# Altium PCB _Geeky_ PCB copy_2023-02-18.pcbdoc
Units mil, origin at the board's own origin, x right, y up, seen from the top; angles counter-clockwise.
Board outline 4000 x 5900 mil, 2 copper layers (Top Layer, Bottom Layer); 83 components, 132 nets, 427 pads, 638 vias.
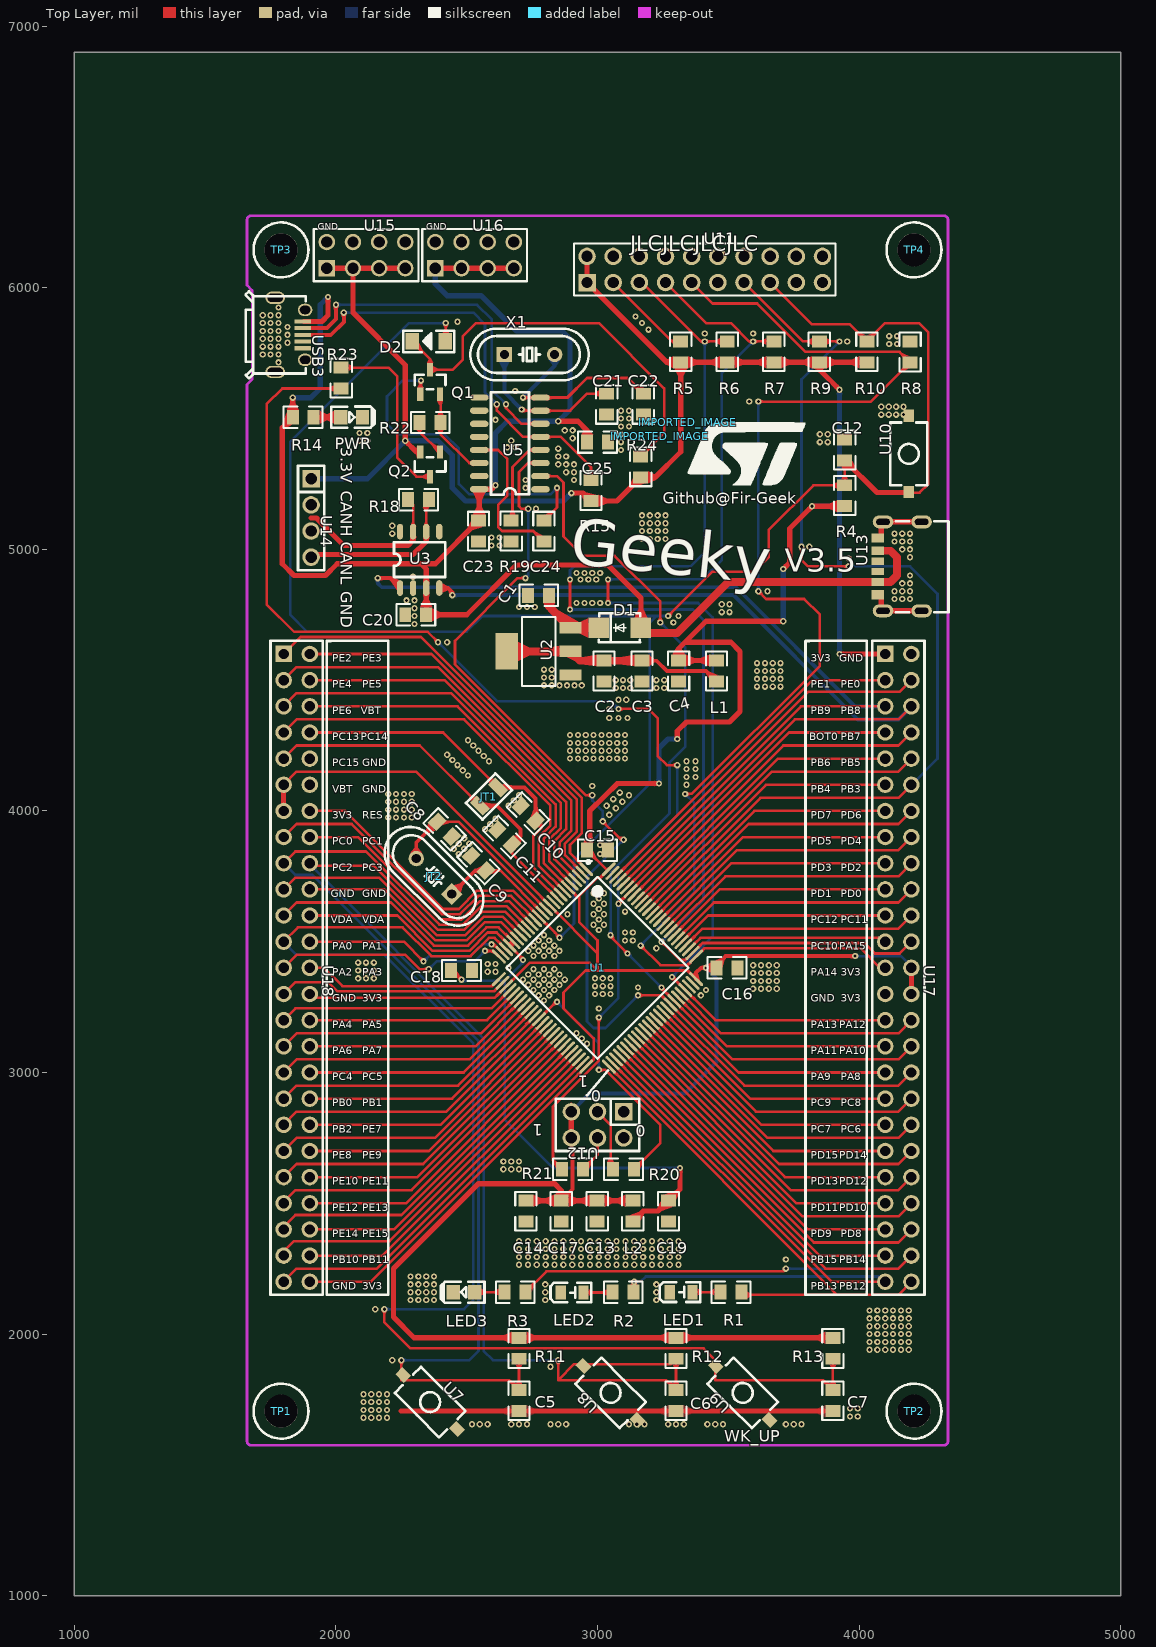
[diagram p0: Top Layer view]
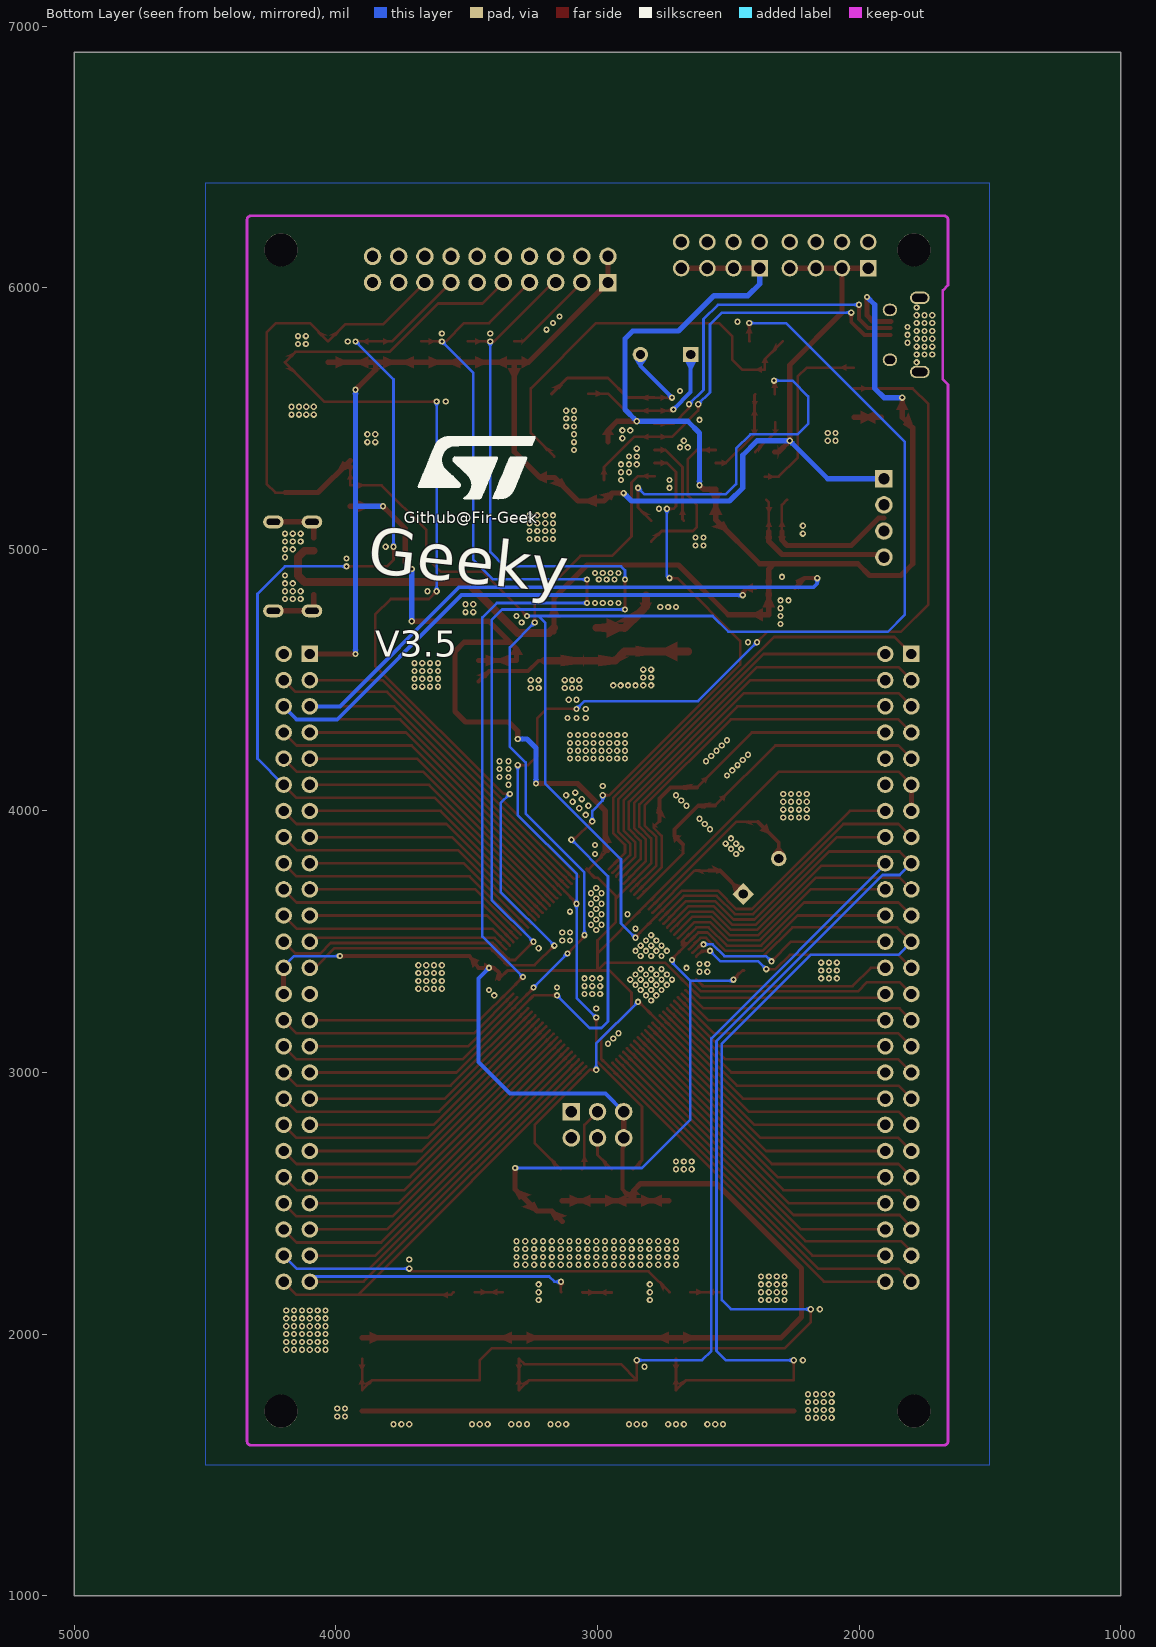
[diagram p1: Bottom Layer view, seen from below]

## Layer stack, top to bottom
Top Layer: signal copper (thickness not stored)
Dielectric: dielectric 12.6, FR-4, Dk 4.8
Bottom Layer: signal copper (thickness not stored)

## Board outline
5000,1000 1000,1000 1000,6900 5000,6900

## Components (designator, comment, footprint, x,y, rotation, side; value= is the part's Value field where it differs from the comment)
C1 "22u" 0805 2775,4824.11 r180 top
C2 "22u" 0805 3025,4535 r270 top
C3 "100n" 0805 3170,4535 r270 top
C4 "22u" 0805 3310,4535 r270 top
C5 "100n" 0805 2700,1745.51 r90 top
C6 "100n" 0805 3300,1745.51 r90 top
C7 "100n" 0805 3900,1745.51 r90 top
C8 "20P" 0805 2415,3930 r135 top
C9 "20P" 0805 2545,3800 r315 top
C10 "10P" 0805 2735,3990 r315 top
C11 "10P" 0805 2645,3900 r315 top
C12 "100n" 0805 3945,5380 r90 top
C13 "22u" 0805 2998.75,2470 r90 top
C14 "100n" 0805 2726.25,2470 r90 top
C15 "100n" 0805 3000,3850 r180 top
C16 "100n" 0805 3495,3400 r180 top
C17 "100n" 0805 2861.25,2470 r90 top
C18 "100n" 0805 2480,3390 r180 top
C19 "22u" 0805 3271.25,2470 r90 top
C20 "100n" 0805 2305,4750 r180 top
C21 "22P" 0805 3035,5555 r90 top
C22 "22P" 0805 3175,5555 r90 top
C23 "100n" 0805 2545,5070 r90 top
C24 "100n" 0805 2670,5070 r270 top
C25 "10u" 0805 3000,5410 r180 top
D1 "SS210" SMA_L4.3-W2.6-LS5.2-FD 3085,4700 r180 top
D2 "IN4148" D1206 2355,5795 r180 top
IMPORTED_IMAGE "IMPORTED_IMAGE" IMPORTED_IMAGE 3237.6,5432.51 r0 top
IMPORTED_IMAGE "IMPORTED_IMAGE" IMPORTED_IMAGE 3345.6,5485.36 r0 top
JT1 "32.768KHz" OSC-SMD_L3.2-W1.5 2585,4055 r45 top
JT2 "8MHz" HC-49US_L11.5-W4.5-P4.88 2375,3750 r135 top
L1 "10u" 0805 3455,4535 r90 top
L2 "10u" 0805 3135,2470 r90 top
LED1 "17-21SUYC/TR8" LED0805-RD 3320,2160 r0 top
LED2 "17-21/BHC-XL2M2TY/3T" LED0805-RD 2902.98,2158.81 r0 top
LED3 "D-W080508W1-KS2" LED-0805 2489.38,2160 r0 top
PWR "17-21SURC/S530-A2/TR8" LED-0805 2060,5505 r180 top
Q1 "SS8050" SOT-23_L2.9-W1.3-P0.95-LS2.4-BR 2360,5640 r270 top
Q2 "SS8550" SOT-23_L2.9-W1.3-P0.95-LS2.4-BR 2360,5325 r90 top
R1 "330" 0805 3510,2160 r180 top
R2 "330" 0805 3097.98,2160.03 r180 top
R3 "330" 0805 2685,2160 r180 top
R4 "10k" 0805 3945,5205 r270 top
R5 "10k" 0805 3318.02,5755 r270 top
R6 "10k" 0805 3496.01,5755 r270 top
R7 "10k" 0805 3674.01,5755 r270 top
R8 "10k" 0805 4195,5755 r90 top
R9 "10k" 0805 3848.02,5755 r270 top
R10 "10k" 0805 4030,5755 r270 top
R11 "10k" 0805 2700,1945.51 r90 top
R12 "10k" 0805 3300,1945.51 r90 top
R13 "10k" 0805 3900,1945.51 r90 top
R14 "1k" 0805 1875,5505 r0 top
R15 "1.5k" 0805 2975,5225 r270 top
R18 "120" 0805 2315,5190 r180 top
R19 "1k" 0805 2795,5070 r90 top
R20 "10k" 0805 3100,2630 r0 top
R21 "10k" 0805 2905,2630 r0 top
R22 "1k" 0805 2360,5485 r180 top
R23 "1k" 0805 2020,5655 r270 top
R24 "10K" 0805 3165,5315 r270 top
TP1 "M3铜柱" M3铜柱_LCEDA 1790,1705 r0 top
TP2 "M3铜柱" M3铜柱_LCEDA 4210,1705 r0 top
TP3 "M3铜柱" M3铜柱_LCEDA 1790,6145 r0 top
TP4 "M3铜柱" M3铜柱_LCEDA 4210,6145 r0 top
U1 "STM32F103VET6" LQFP-100_L14.0-W14.0-P0.50-LS16.0-BL 3000,3400 r225 top
U2 "AMS1117-3.3" SOT-223_L6.5-W3.5-P2.30-LS7.0-BR 2775,4610 r0 top
U3 "TJA1050T" SOIC-8_L5.0-W4.0-P1.27-LS6.0-BL 2320,4960 r0 top
U5 "CH340G" SOIC-16_L9.9-W3.9-P1.27-LS6.0-BL 2665,5405 r90 top
U7 "KEY-SMD_2P-L6.0-W3.6-P7.4-LS8.0-L" KEY-SMD_2P-L6.0-W3.6-P7.4-LS8.0-L 2360,1740 r315 top
U8 "KEY-SMD_2P-L6.0-W3.6-P7.4-LS8.0-L" KEY-SMD_2P-L6.0-W3.6-P7.4-LS8.0-L 3050,1775 r135 top
U9 "KEY-SMD_2P-L6.0-W3.6-P7.4-LS8.0-L" KEY-SMD_2P-L6.0-W3.6-P7.4-LS8.0-L 3555,1775 r135 top
U10 "KEY-SMD_2P-L6.0-W3.6-P7.4-LS8.0-L" KEY-SMD_2P-L6.0-W3.6-P7.4-LS8.0-L 4190,5365 r90 top
U11 "HDR-TH_20P-P2.54-V-M-R2-C10-S2.54-3" HDR-TH_20P-P2.54-V-M-R2-C10-S2.54-3 3410,6070 r0 top
U12 "HDR-TH_6P-P2.54-V-F-R2-C3-S2.54-3" HDR-TH_6P-P2.54-V-F-R2-C3-S2.54-3 3000,2800 r180 top
U13 "USB-SMD_U262-061N-4BVC11" USB-SMD_U262-061N-4BVC11 4155,4935 r90 top
U14 "HDR-TH_4P-P2.54-V-M" HDR-TH_4P-P2.54-V-M 1905,5120 r270 top
U15 "HDR-TH_8P-P2.54-V-F-R2-C4-S2.54-3" HDR-TH_8P-P2.54-V-F-R2-C4-S2.54-3 2115,6125 r0 top
U16 "HDR-TH_8P-P2.54-V-F-R2-C4-S2.54-3" HDR-TH_8P-P2.54-V-F-R2-C4-S2.54-3 2530,6125 r0 top
U17 "HDR-TH_50P-P2.54-V-F-R2-C25-S2.54-3" HDR-TH_50P-P2.54-V-F-R2-C25-S2.54-3 4150,3400 r270 top
U18 "HDR-TH_50P-P2.54-V-F-R2-C25-S2.54-3" HDR-TH_50P-P2.54-V-F-R2-C25-S2.54-3 1850,3400 r270 top
USB3 "MICRO-USB-SMD_U254-051T-4BHJ25-F2S" MICRO-USB-SMD_U254-051T-4BHJ25-F2S 1825,5820 r270 top
X1 "12MHz" HC-49US_L11.5-W4.5-P4.88 2740,5745 r0 top

## Footprints (in the part's own frame and the unit in brackets; to place one, negate y for a bottom-side part, rotate by r counter-clockwise, add the part's x,y. Pads: shape width x height; smd on the part's side, far side on the other; paste and mask are expansions set on the pad)
0805 [mm]
  rect 1.16x1.45 smd: 1(-1.016,0) 2(1.016,0)
  silkscreen extent -1.9,-1.03 1.87,1.04
D1206 [mm]
  rect 1.3x1.6 smd: 1(-1.6,0) 2(1.6,0)
  silkscreen extent -2.49,-1.04 2.49,1.04
HC-49US_L11.5-W4.5-P4.88 [mm]
  rect 1.5x1.5 hole 0.9: 1(-2.438,0)
  round 1.5 hole 0.9: 2(2.438,0)
  silkscreen extent -5.74,-2.5 5.74,2.5
HDR-TH_4P-P2.54-V-M [mm]
  rect 1.7x1.7 hole 1.1: 1(-3.81,0)
  round 1.7 hole 1.1: 2(-1.27,0) 3(1.27,0) 4(3.81,0)
  silkscreen extent -5.08,-1.27 5.08,1.27
HDR-TH_6P-P2.54-V-F-R2-C3-S2.54-3 [mm]
  rect 1.7x1.7 hole 1.1: 1(-2.54,-1.27)
  round 1.7 hole 1.1: 2(-2.54,1.27) 3(0,-1.27) 4(0,1.27) 5(2.54,-1.27) 6(2.54,1.27)
  silkscreen extent -4.04,-2.54 4.04,2.54
HDR-TH_8P-P2.54-V-F-R2-C4-S2.54-3 [mm]
  rect 1.6x1.6 hole 1.1: 1(-3.81,-1.27)
  round 1.6 hole 1.1: 2(-3.81,1.27) 3(-1.27,-1.27) 4(-1.27,1.27) 5(1.27,-1.27) 6(1.27,1.27) 7(3.81,-1.27) 8(3.81,1.27)
  silkscreen extent -5.08,-2.54 5.08,2.54
HDR-TH_20P-P2.54-V-M-R2-C10-S2.54-3 [mm]
  rect 1.7x1.7 hole 1.1: 1(-11.43,-1.27)
  round 1.7 hole 1.1: 2(-11.43,1.27) 3(-8.89,-1.27) 4(-8.89,1.27) 5(-6.35,-1.27) 6(-6.35,1.27) 7(-3.81,-1.27) 8(-3.81,1.27) 9(-1.27,-1.27) 10(-1.27,1.27) 11(1.27,-1.27) 12(1.27,1.27) 13(3.81,-1.27) 14(3.81,1.27) 15(6.35,-1.27) 16(6.35,1.27) 17(8.89,-1.27) 18(8.89,1.27) 19(11.43,-1.27) 20(11.43,1.27)
  silkscreen extent -12.7,-2.54 12.7,2.54
HDR-TH_50P-P2.54-V-F-R2-C25-S2.54-3 [mm]
  rect 1.6x1.6 hole 1: 1(-30.48,-1.27)
  round 1.6 hole 1: 2(-30.48,1.27) 3(-27.94,-1.27) 4(-27.94,1.27) 5(-25.4,-1.27) 6(-25.4,1.27) 7(-22.86,-1.27) 8(-22.86,1.27) 9(-20.32,-1.27) 10(-20.32,1.27) 11(-17.78,-1.27) 12(-17.78,1.27) 13(-15.24,-1.27) 14(-15.24,1.27) 15(-12.7,-1.27) 16(-12.7,1.27) 17(-10.16,-1.27) 18(-10.16,1.27) 19(-7.62,-1.27) 20(-7.62,1.27) 21(-5.08,-1.27) 22(-5.08,1.27) 23(-2.54,-1.27) 24(-2.54,1.27) 25(0,-1.27) 26(0,1.27) 27(2.54,-1.27) 28(2.54,1.27) 29(5.08,-1.27) 30(5.08,1.27) 31(7.62,-1.27) 32(7.62,1.27) 33(10.16,-1.27) 34(10.16,1.27) 35(12.7,-1.27) 36(12.7,1.27) 37(15.24,-1.27) 38(15.24,1.27) 39(17.78,-1.27) 40(17.78,1.27) 41(20.32,-1.27) 42(20.32,1.27) 43(22.86,-1.27) 44(22.86,1.27) 45(25.4,-1.27) 46(25.4,1.27) 47(27.94,-1.27) 48(27.94,1.27) 49(30.48,-1.27) 50(30.48,1.27)
  silkscreen extent -31.75,-2.54 31.75,2.54
IMPORTED_IMAGE [mil]
KEY-SMD_2P-L6.0-W3.6-P7.4-LS8.0-L [mm]
  rect 1.2x1 smd: 1(-3.7,0) 2(3.7,0)
  silkscreen extent -3.05,-1.8 3.05,1.8
LED0805-RD [mm]
  rect 1x1.4 smd: 1(-1.1,0) 2(1.1,0)
  silkscreen extent -2.1,-0.95 1.85,0.95
LED-0805 [mil]
  rect 51.2x55.1 smd: 1(41.35,0) 2(-41.35,0)
  silkscreen extent -88,-41 78,40
LQFP-100_L14.0-W14.0-P0.50-LS16.0-BL [mm]
  oval 0.28x1.8 smd: 1(-6,-7.55) 2(-5.5,-7.55) 3(-5,-7.55) 4(-4.5,-7.55) 5(-4,-7.55) 6(-3.5,-7.55) 7(-3,-7.55) 8(-2.5,-7.55) 9(-2,-7.55) 10(-1.5,-7.55) 11(-1,-7.55) 12(-0.5,-7.55) 13(0,-7.55) 14(0.5,-7.55) 15(1,-7.55) 16(1.5,-7.55) 17(2,-7.55) 18(2.5,-7.55) 19(3,-7.55) 20(3.5,-7.55) 21(4,-7.55) 22(4.5,-7.55) 23(5,-7.55) 24(5.5,-7.55) 25(6,-7.55) 51(6,7.55) 52(5.5,7.55) 53(5,7.55) 54(4.5,7.55) 55(4,7.55) 56(3.5,7.55) 57(3,7.55) 58(2.5,7.55) 59(2,7.55) 60(1.5,7.55) 61(1,7.55) 62(0.5,7.55) 63(0,7.55) 64(-0.5,7.55) 65(-1,7.55) 66(-1.5,7.55) 67(-2,7.55) 68(-2.5,7.55) 69(-3,7.55) 70(-3.5,7.55) 71(-4,7.55) 72(-4.5,7.55) 73(-5,7.55) 74(-5.5,7.55) 75(-6,7.55)
  oval 1.8x0.28 smd: 26(7.55,-6) 27(7.55,-5.5) 28(7.55,-5) 29(7.55,-4.5) 30(7.55,-4) 31(7.55,-3.5) 32(7.55,-3) 33(7.55,-2.5) 34(7.55,-2) 35(7.55,-1.5) 36(7.55,-1) 37(7.55,-0.5) 38(7.55,0) 39(7.55,0.5) 40(7.55,1) 41(7.55,1.5) 42(7.55,2) 43(7.55,2.5) 44(7.55,3) 45(7.55,3.5) 46(7.55,4) 47(7.55,4.5) 48(7.55,5) 49(7.55,5.5) 50(7.55,6) 76(-7.55,6) 77(-7.55,5.5) 78(-7.55,5) 79(-7.55,4.5) 80(-7.55,4) 81(-7.55,3.5) 82(-7.55,3) 83(-7.55,2.5) 84(-7.55,2) 85(-7.55,1.5) 86(-7.55,1) 87(-7.55,0.5) 88(-7.55,0) 89(-7.55,-0.5) 90(-7.55,-1) 91(-7.55,-1.5) 92(-7.55,-2) 93(-7.55,-2.5) 94(-7.55,-3) 95(-7.55,-3.5) 96(-7.55,-4) 97(-7.55,-4.5) 98(-7.55,-5) 99(-7.55,-5.5) 100(-7.55,-6)
  silkscreen extent -6.8,-8.05 6.25,6.25
M3铜柱_LCEDA [mm]
  round 3.2 hole 3.2: 1(0,0)
  silkscreen extent -2.66,-2.67 2.67,2.67
MICRO-USB-SMD_U254-051T-4BHJ25-F2S [mm]
  rect 0.4x1.6 smd: 1(-1.3,1.2) 2(-0.65,1.2) 3(0,1.2) 4(0.65,1.2) 5(1.3,1.208)
  oval 1.2x1.4 hole 0.8 slot 1 at 90 deg: 6(2.425,1.45) 7(-2.425,1.45)
  oval 1.2x1.9 hole 0.8 slot 1.5 at 90 deg: 8(-3.6,-1.45) 9(3.6,-1.45)
  silkscreen extent -4.23,-4.32 4.23,1.53
OSC-SMD_L3.2-W1.5 [mm]
  rect 1x1.8 smd: 1(-1.25,0) 2(1.25,0)
  silkscreen extent -2.03,-1.14 2.03,1.14
SMA_L4.3-W2.6-LS5.2-FD [mm]
  rect 2x2 smd: 1(-2.057,0) 2(2.057,0)
  silkscreen extent -2.01,-1.4 2.03,1.4
SOIC-8_L5.0-W4.0-P1.27-LS6.0-BL [mm]
  oval 0.6x1.52 smd: 1(-1.905,-2.74) 2(-0.635,-2.74) 3(0.635,-2.74) 4(1.905,-2.74) 5(1.905,2.74) 6(0.635,2.74) 7(-0.635,2.74) 8(-1.905,2.74)
  silkscreen extent -2.49,-1.67 2.5,1.7
SOIC-16_L9.9-W3.9-P1.27-LS6.0-BL [mm]
  oval 0.6x1.8 smd: 1(-4.445,-2.972) 2(-3.175,-2.972) 3(-1.905,-2.972) 4(-0.635,-2.972) 5(0.635,-2.972) 6(1.905,-2.972) 7(3.175,-2.972) 8(4.445,-2.972) 9(4.445,2.972) 10(3.175,2.972) 11(1.905,2.972) 12(0.635,2.972) 13(-0.635,2.972) 14(-1.905,2.972) 15(-3.175,2.972) 16(-4.445,2.972)
  silkscreen extent -4.98,-1.85 4.98,1.83
SOT-23_L2.9-W1.3-P0.95-LS2.4-BR [mm]
  rect 1.3x0.6 smd: 1(1.2,-0.95) 2(1.2,0.95) 3(-1.2,0)
  silkscreen extent -0.7,-1.5 0.7,1.5
SOT-223_L6.5-W3.5-P2.30-LS7.0-BR [mil]
  rect 85x43 smd: 1(122,-90.5) 2(122,0.5) 3(122,90.5)
  rect 85x138 smd: 4(-122,0.5)
  silkscreen extent -64,-132 64,132
USB-SMD_U262-061N-4BVC11 [mm]
  oval 1.25x2 hole 0.6 slot 1.3 at 90 deg: 7(-4.32,1.611) 8(4.32,1.611) 9(-4.32,-2.139) 10(4.32,-2.139)
  rect 0.7x1.2 smd: A5(-0.5,2.139) B5(0.5,2.139)
  rect 0.8x1.2 smd: A9(1.52,2.139) B9(-1.52,2.139)
  rect 0.9x1.2 smd: A12(2.75,2.139) B12(-2.75,2.139)
  silkscreen extent -4.47,-4.75 4.4,0.39

## Via types
v1: diameter 24, hole 12, Top Layer to Bottom Layer, tented both sides, 638 vias

## Nets (pads, with @x,y where several pads share a name; then routed paths per layer and width w, separated by ;. In a path a pad name is that pad's centre, name@x,y a point inside that pad or via, vN(x,y) a via of type N, cw(c..) or ccw(c..) an arc to the next point about the centre after c; other vN are vias at no path point)
+5V: C20.1 C23.2 C25.2 D1.1 R14.1 U3.3 U5.16 | length 6775.9
  Top Layer w20: v1(1835,5580) 1835,5560 R14.1 1795,5465 1795,4945 1840,4900 1960,4900 2005,4945 2325,4945 ; 1879,5871.2 1946.2,5871.2 1970,5895 v1(1970,5965) ; U3.3 2345,4925 2325,4945 ; U3.3 C20.1 2500,4750 2690,4940 3040,4940 3166,4814 D1.1 D1.1@3166,4685 ; 2380,6075 2480.01,6075 2580.01,6075 2680.01,6075 ; v1(2610,5245) 2595,5230 U5.16 2548,5113 C23.2 2380,4945 2325,4945 ; v1(2850,5490) 2925,5490 2960,5455 C25.2
  Top Layer w30: D1.1 3186,4680 3305,4680 3500.2,4875.2 4085.2,4875.2 4120.2,4875.2 4145,4900 4145,4970 4120.2,4994.8 4085.2,4994.8
  Bottom Layer w20: v1(1835,5580) 1905,5580 1940,5615 1940,5935 v1(1970,5965) ; 2380,6075 2380,6015 2425,5970 2555,5970 2690,5835 2865,5835 2895,5805 2895,5535 v1(2850,5490) 2655,5490 2610,5445 v1(2610,5245)
BOOT0: R21.1 R23.2 U1.94 | length 6033.3
  Top Layer w10: R23.2 1795,5615 1735,5555 1735,4790 1840,4685 2350,4685 v1(2390,4645) ; R21.1 2830,2665 2830,2870 3005,3045 v1(3005,3210) ; v1(3080,3645) 3080,3647 U1.94 3733,4300 4100,4300 ; v1(3080,4390) 3195,4390 3230,4355 3230,4210 3265,4175 v1(3305,4175)
  Bottom Layer w10: v1(2390,4645) 2615,4420 3050,4420 v1(3080,4390) ; v1(3005,3210) 3080,3285 v1(3080,3645) 3080,3760 3305,3985 v1(3305,4175)
GND: C1.2 C2.2 C3.2 C4.2 C5.1 C6.1 C7.1 C8.1 C9.1 C10.1 C11.1 C12.2 C13.1 C14.1 C15.1 C16.1 C17.1 C18.1 C19.1 C20.2 C21.1 C22.1 C23.1 C24.2 C25.1 LED1.1 LED2.1 LED3.2 PWR.2 R8.2 U1.10 U1.19 U1.20 U1.27 U1.49 U1.74 U1.99 U2.1 U3.2 U3.8 U5.1 | length 6447.1
  Top Layer w10: 1800,2200 1850,2250 2156.2,2250 U1.49 ; 1800,3300 1845,3345 1970,3345 2005,3310 2603.8,3310 U1.27 ; 1800,3700 1845,3745 2165,3745 2385,3525 2495,3525 2565,3595 2638,3595 U1.19 ; 1900,3700 2185,3700 2380,3505 2500,3505 2570,3575 2630.1,3575 U1.20
  Top Layer w20: 2250,1705.9 2550,1705.9 C5.1 2850,1705.9 3150,1705.9 C6.1 3450,1705.9 3750,1705.9 C7.1 ; 4085.2,4826.7 4085.2,4764.9 4234.8,4764.9 ; 4085.2,5043.3 4085.2,5105.1 4234.8,5105.1
  other v1: 2520,1655 2550,1655 2580,1655 2670,1655 2700,1655 2730,1655 2820,1655 2850,1655 2880,1655 3120,1655 3150,1655 3180,1655 3270,1655 3300,1655 3330,1655 3420,1655 3450,1655 3480,1655 3720,1655 3750,1655 3780,1655 2105,1680 2135,1680 2165,1680 2195,1680 3965,1685 3995,1685 2105,1710 2135,1710 2165,1710 2195,1710 3965,1715 3995,1715 2105,1740 2135,1740 2165,1740 2195,1740 2105,1770 2135,1770 2165,1770 2195,1770 2820,1875 2215,1900 4040,1940 4070,1940 4100,1940 4130,1940 4160,1940 4190,1940 4040,1970 4070,1970 4100,1970 4130,1970 4160,1970 4190,1970 4040,2000 4070,2000 4100,2000 4130,2000 4160,2000 4190,2000 4040,2030 4070,2030 4100,2030 4130,2030 4160,2030 4190,2030 4040,2060 4070,2060 4100,2060 4130,2060 4160,2060 4190,2060 4040,2090 4070,2090 4100,2090 4130,2090 4160,2090 4190,2090 2150,2095 2285,2130 2315,2130 2345,2130 2375,2130 2800,2130 3225,2130 2285,2160 2315,2160 2345,2160 2375,2160 2800,2160 3225,2160 2285,2190 2315,2190 2345,2190 2375,2190 2800,2190 3225,2190 2285,2220 2315,2220 2345,2220 2375,2220 2700,2265 2733.89,2265 2767.78,2265 2801.67,2265 2835.56,2265 2869.45,2265 2903.34,2265 2937.23,2265 2971.11,2265 3005,2265 3038.89,2265 3072.78,2265 3106.67,2265 3140.56,2265 3174.45,2265 3208.34,2265 3242.23,2265 3276.11,2265 3310,2265 3720,2285 2700,2295 2733.89,2295 2767.78,2295 2801.67,2295 2835.56,2295 2869.45,2295 2903.34,2295 2937.23,2295 2971.11,2295 3005,2295 3038.89,2295 3072.78,2295 3106.67,2295 3140.56,2295 3174.45,2295 3208.34,2295 3242.23,2295 3276.11,2295 3310,2295 2700,2325 2733.89,2325 2767.78,2325 2801.67,2325 2835.56,2325 2869.45,2325 2903.34,2325 2937.23,2325 2971.11,2325 3005,2325 3038.89,2325 3072.78,2325 3106.67,2325 3140.56,2325 3174.45,2325 3208.34,2325 3242.23,2325 3276.11,2325 3310,2325 2700,2355 2733.89,2355 2767.78,2355 2801.67,2355 2835.56,2355 2869.45,2355 2903.34,2355 2937.23,2355 2971.11,2355 3005,2355 3038.89,2355 3072.78,2355 3106.67,2355 3140.56,2355 3174.45,2355 3208.34,2355 3242.23,2355 3276.11,2355 3310,2355 2640,2630 2670,2630 2700,2630 2640,2660 2670,2660 2700,2660 2960,3110 2940,3130 2920,3150 3005,3245 2795,3275 2775,3295 2815,3295 3395,3295 2990,3300 3020,3300 3050,3300 2755,3315 2795,3315 2835,3315 3415,3315 3595,3320 3625,3320 3655,3320 3685,3320 3155,3325 2990,3330 3020,3330 3050,3330 2735,3335 2775,3335 2815,3335 2855,3335 3595,3350 3625,3350 3655,3350 3685,3350 2715,3355 2755,3355 2795,3355 2835,3355 2875,3355 2085,3360 2115,3360 2145,3360 2990,3360 3020,3360 3050,3360 2735,3375 2775,3375 2815,3375 2855,3375 3595,3380 3625,3380 3655,3380 3685,3380 2580,3385 2610,3385 2085,3390 2115,3390 2145,3390 2755,3395 2795,3395 2835,3395 2660,3400 3595,3410 3625,3410 3655,3410 3685,3410 2580,3415 2610,3415 2085,3420 2115,3420 2145,3420 2755,3445 2795,3445 2835,3445 2735,3465 2775,3465 2815,3465 2855,3465 3225,3475 2755,3485 2795,3485 2835,3485 2775,3505 2815,3505 3105,3505 3135,3505 2795,3525 3105,3535 3135,3535 3005,3545 2855,3550 2985,3565 3025,3565 3005,3585 2885,3605 2985,3605 3025,3605 3105,3615 3005,3625 2985,3645 3025,3645 3005,3665 2985,3685 3025,3685 3005,3705 2470,3835 3010,3835 2450,3855 2490,3855 3010,3870 2470,3875 2510,3875 2490,3895 2570,3930 2590,3950 2610,3970 2200,3975 2230,3975 2260,3975 2290,3975 3045,3985 2200,4005 2230,4005 2260,4005 2290,4005 3070,4010 2660,4020 3035,4020 2200,4035 2230,4035 2260,4035 2290,4035 3095,4035 2680,4040 3060,4045 2700,4060 3120,4060 2200,4065 2230,4065 2260,4065 2290,4065 3085,4070 2980,4095 3340,4100 3340,4130 3375,4130 2505,4135 2485,4155 3340,4160 3375,4160 2465,4175 2585,4190 3340,4190 3375,4190 2445,4195 2895,4200 2925,4200 2955,4200 2985,4200 3015,4200 3045,4200 3075,4200 3105,4200 2565,4210 2425,4215 2545,4230 2895,4230 2925,4230 2955,4230 2985,4230 3015,4230 3045,4230 3075,4230 3105,4230 2525,4250 2895,4260 2925,4260 2955,4260 2985,4260 3015,4260 3045,4260 3075,4260 3105,4260 2505,4270 2895,4290 2925,4290 2955,4290 2985,4290 3015,4290 3045,4290 3075,4290 3105,4290 3045,4355 3080,4355 3115,4355 3045,4390 3080,4425 3110,4425 3070,4470 3097.5,4470 3125,4470 3225,4470 3255,4470 3610,4475 3640,4475 3670,4475 3700,4475 2795,4480 2825,4480 2855,4480 2883.33,4480 2911.67,4480 2940,4480 3070,4500 3097.5,4500 3125,4500 3225,4500 3255,4500 3610,4505 3640,4505 3670,4505 3700,4505 2795,4510 2825,4510 3610,4535 3640,4535 3670,4535 3700,4535 2795,4540 2825,4540 3610,4565 3640,4565 3670,4565 3700,4565 2425,4645 2300,4715 3290,4720 2300,4745 3310,4745 3475,4760 3505,4760 2300,4775 2700,4780 2730,4780 2760,4780 3475,4790 3505,4790 2920,4795 2950,4795 2980,4795 3010,4795 2270,4805 2300,4805 4135,4810 4165,4810 4195,4810 3650,4840 4135,4840 4165,4840 4195,4840 4165,4870 4195,4870 2935,4885 2965,4885 2995,4885 2295,4895 4195,4900 2920,4910 2950,4910 2980,4910 3010,4910 3960,4965 4195,4970 4165,5000 4195,5000 3810,5010 2595,5015 2625,5015 4135,5030 4165,5030 4195,5030 3170,5040 3200,5040 3230,5040 3260,5040 2595,5045 2625,5045 2215,5060 4135,5060 4165,5060 4195,5060 3170,5070 3200,5070 3230,5070 3260,5070 2215,5090 3170,5100 3200,5100 3230,5100 3260,5100 3170,5130 3200,5130 3230,5130 3260,5130 2765,5155 2725,5235 2725,5265 2910,5265 2880,5295 2910,5295 2850,5325 2880,5325 2910,5325 2850,5355 2880,5355 3090,5380 2850,5385 2655,5390 2685,5390 3090,5410 3850,5410 3880,5410 2090,5415 2120,5415 2670,5415 2905,5425 3090,5440 3850,5440 3880,5440 2090,5445 2120,5445 2875,5455 2905,5455 3090,5470 3120,5470 2610,5495 3090,5500 3120,5500 4085,5515 4113.33,5515 4141.67,5515 4170,5515 3090,5530 3120,5530 4085,5545 4113.33,5545 4141.67,5545 4170,5545 3580,5565 2685,5605 1780,5715 1720,5745 1750,5745 1780,5745 1720,5775 1750,5775 1780,5775 4115,5785 4145,5785 1815,5790 3955,5795 1720,5805 1750,5805 1780,5805 4115,5815 4145,5815 1815,5820 3410,5825 3595,5825 1720,5835 1750,5835 1780,5835 3195,5840 1815,5850 1720,5865 1750,5865 1780,5865 3170,5865 2465,5870 3145,5890 1720,5895 1750,5895 1780,5895 1780,5925
JTRST: R5.1 | length 351.2
  Top Layer w10: 3060,6020 3285,5795 R5.1
NULL: 
OSC-IN: C8.2 JT2.2 U1.12 | length 728.8
  Top Layer w10: C8.2 2469.6,3958.3 U1.12
  Top Layer w15: JT2.2 2307.1,3878.7 C8.2
OSC-OUT: C9.2 JT2.1 U1.13 | length 450.9
  Top Layer w10: C9.2 2628.3,3771.7 U1.13
  Top Layer w15: JT2.1 2532.5,3771.7 C9.2
P3_3: R20.1 | length 244.9
  Top Layer w10: 3000,2850 3050,2800 3050,2640 R20.1
P3_4: R21.2 | length 142.8
  Top Layer w10: R21.2 3000,2685 3000,2750
PA0: C7.2 R13.1 U1.23 | length 5224.2
  Top Layer w10: 1800,3500 1855,3555 2255,3555 2365,3445 2515,3445 2585,3515 2606.6,3515 U1.23 ; v1(2185,2095) 2185,2045 2285,1945 3405,1945 3450,1900 3449.99,1824.05 ; 3450,1824 3750,1824 3861.5,1824 C7.2 R13.1
  Bottom Layer w10: 1800,3500 1850,3450 2185,3450 2525,3110 2525,2130 2490,2095 v1(2185,2095)
PA1: U1.24 | length 808.3
  Top Layer w10: 1900,3500 2260,3500 v1(2335,3425) ; v1(2595,3490) 2603.8,3490 U1.24
  Bottom Layer w10: v1(2335,3425) 2355,3445 2515,3445 2560,3490 v1(2595,3490)
PA2: U1.25 | length 904.4
  Top Layer w10: 1800,3400 1850,3450 2265,3450 2320,3395 v1(2355,3395) ; v1(2570,3465) 2600.9,3465 U1.25
  Bottom Layer w10: v1(2355,3395) 2385,3425 2530,3425 v1(2570,3465)
PA3: U1.26 | length 762.9
  Top Layer w10: 1900,3400 1955,3400 2025,3330 2595.9,3330 U1.26
PA4: U1.29 | length 912.2
  Top Layer w10: 1800,3200 1845,3245 2594.4,3245 U1.29
PA5: U1.30 | length 820.4
  Top Layer w10: 1900,3200 2577.3,3200 U1.30
PA6: U1.31 | length 970
  Top Layer w10: 1800,3100 1850,3150 2555.1,3150 U1.31
PA7: U1.32 | length 878.1
  Top Layer w10: 1900,3100 2533,3100 U1.32
PA8: U1.67 | length 1077.2
  Top Layer w10: U1.67 3561.4,2950 4150,2950 4200,3000
PA9: U1.68 U5.3 | length 4029.2
  Top Layer w10: v1(2725,4890) 2695,4890 2455,4650 2455,4560 2955,4060 v1(2980,4060) ; v1(2735,5155) 2710,5155 2700,5165 2700,5295 2735,5330 U5.3 ; v1(3020,3960) 3090,3890 v1(3100,3890) ; v1(3155,3295) 3244.2,3295 U1.68 3539.2,3000 4100,3000
  Bottom Layer w10: v1(2725,4890) 2735,4900 v1(2735,5155) ; v1(2980,4060) 2980,4040 3020,4000 v1(3020,3960) ; v1(3100,3890) 2960,3750 2960,3195 2985,3170 3030,3170 v1(3155,3295)
PA10: U1.69 U5.2 | length 3581.5
  Top Layer w10: U5.2 2845,5280 2870,5255 2870,5050 2945,4975 3065,4975 3240,4800 v1(3240,4720) ; v1(3050,3525) 3050,3520 v1(3115,3455) ; v1(3245,3325) 3245,3322 U1.69 3517,3050 4150,3050 4200,3100
  Bottom Layer w10: v1(3050,3525) 3050,3765 3275,3990 3275,4185 3335,4245 3335,4625 v1(3240,4720) ; v1(3115,3455) v1(3245,3325)
PA11: U1.70 | length 870
  Top Layer w10: U1.70 3494.9,3100 4100,3100
PA12: U1.71 | length 961.8
  Top Layer w10: U1.71 3472.7,3150 4150,3150 4200,3200
PA13: R7.1 U1.72 | length 4693.3
  Top Layer w10: v1(3040,4795) v1(3040,4885) ; 3260,6020 3415,5865 3510,5865 3580,5795 v1(3595,5795) R7.1 ; v1(3285,3365) 3285.6,3365 U1.72 3450.6,3200 4100,3200
  Bottom Layer w10: v1(3040,4795) 3385,4795 3440,4740 3440,3520 v1(3285,3365) ; v1(3040,4885) 3400,4885 3475,4960 3475,5675 v1(3595,5795)
PA14: R8.1 U1.76 | length 5217.2
  Top Layer w10: v1(3165,3485) 3240,3410 3344.1,3410 U1.76 3409.1,3475 4005,3475 4080,3400 4100,3400 ; v1(3335,4065) 3360,4065 3850,4555 3850,4750 3790,4810 3645,4810 v1(3615,4840) ; 3360,6020 3440,5940 3610,5940 3795,5755 4155,5755 R8.1 4045,5565 v1(3615,5565)
  Bottom Layer w10: v1(3165,3485) 3370,3690 3370,4030 v1(3335,4065) ; v1(3615,4840) v1(3615,5565)
PA15: R6.1 U1.77 | length 4797.2
  Top Layer w10: v1@2895,4767.5 v1@2895,4882.5 ; 3160,6020 3170,6020 3395,5795 v1(3410,5795) R6.1 ; v1(3245,3500) 3315,3430 3336.2,3430 U1.77 3401.2,3495 4020,3495 4060,3455 4155,3455 4200,3500
  Bottom Layer w10: v1(2895,4770) 3365,4770 3405,4730 3405,3660 v1(3245,3500) ; v1(2895,4885) 2895,4920 2910,4935 3355,4935 3410,4990 v1(3410,5795)
PB0: U1.35 | length 1085.5
  Top Layer w10: 1800,2900 1850,2950 2466.5,2950 U1.35
PB1: U1.36 | length 993.6
  Top Layer w10: 1900,2900 2444.3,2900 U1.36
PB2: R20.2 U1.37 | length 2098.8
  Top Layer w10: 1800,2800 1850,2850 2422.2,2850 U1.37 2837.2,3265 v1(2845,3270) ; v1(3005,3010) 3030,3010 3240,2800 3240,2730 R20.2
  Bottom Layer w10: v1(2845,3270) 3005,3110 v1(3005,3010)
PB3: R9.1 U1.89 | length 3899.3
  Top Layer w10: U1.89 3622.2,4050 4150,4050 4200,4100 ; 3560.01,6020 3785.01,5795 R9.1 v1(3925,5795) ; v1(3780,5010) 3780,4960 3805,4935 v1(3960,4935)
  Bottom Layer w10: v1(3780,5010) 3780,5650 v1(3925,5795) ; v1(3960,4935) 4195,4935 4300,4830 4300,4200 4200,4100
PB4: U1.90 | length 1109.1
  Top Layer w10: U1.90 3644.3,4100 4100,4100
PB5: U1.91 | length 1258.6
  Top Layer w10: U1.91 3666.5,4150 4150,4150 4200,4200
PB6: U1.92 | length 1166.7
  Top Layer w10: U1.92 3155.9,3665.9 3690,4200 4100,4200
PB7: U1.93 | length 1316.3
  Top Layer w10: U1.93 3710.8,4250 4150,4250 4200,4300
PB8: U1.95 U3.4 | length 3413.6
  Top Layer w10: U1.95 3755.1,4350 4150,4350 4200,4400
  Top Layer w15: U3.4 2427.9,4852.1 2445,4835 v1(2445,4825)
  Bottom Layer w15: v1(2445,4825) 3520,4825 3995,4350 4150,4350 4200,4400
PB9: U1.96 U3.1 | length 3537.6
  Top Layer w10: U1.96 3777.3,4400 4100,4400
  Top Layer w15: v1(2160,4890) 2207.1,4890 U3.1
  Bottom Layer w15: v1(2160,4890) 2160,4870 2175,4855 3530,4855 3985,4400 4100,4400
PB10: U1.47 | length 1440.6
  Top Layer w10: 1800,2300 1800,2315 1840,2355 2205.6,2355 U1.47
PB11: U1.48 | length 1339.9
  Top Layer w10: 1900,2300 2178.4,2300 U1.48
PB12: R1.1 U1.51 | length 2214
  Top Layer w10: U1.51 3915.9,2150 4150,2150 ; R1.1 3560,2150 4150,2150 ; 4150,2150 4200,2200 4150,2150
PB13: R2.1 U1.52 | length 2406.8
  Top Layer w10: U1.52 3893.8,2200 4100,2200 ; R2.1 3140,2162.06 v1(3140,2200)
  Bottom Layer w10: v1(3140,2200) 3165,2200 3185,2220 4080,2220 4100,2200
PB14: R3.1 U1.53 | length 3014.3
  Top Layer w10: R3.1 2805,2240 3710,2240 v1(3720,2250) ; U1.53 3871.6,2250 4150,2250 4200,2300
  Bottom Layer w10: v1(3720,2250) 4150,2250 4200,2300
PB15: U1.54 | length 1331.7
  Top Layer w10: U1.54 3849.4,2300 ; 3849.44,2300 4100,2300
PC0: U1.15 | length 1193
  Top Layer w10: 1800,3900 1850,3950 2060,3950 2405,3605 2475,3605 2545,3675 2669.3,3675 U1.15
PC1: U1.16 | length 1043.4
  Top Layer w10: 1900,3900 2085,3900 2400,3585 2480,3585 2550,3655 2661.5,3655 U1.16
PC2: C5.2 R11.1 U1.17 | length 4314.2
  Top Layer w10: 1800,3800 1845,3845 2115,3845 2395,3565 2485,3565 2555,3635 2653.6,3635 U1.17 ; 2250,1824.05 v1(2250,1900) ; 2250,1824.1 2550,1824.1 2661.5,1824.1 C5.2 R11.1
  Bottom Layer w10: 1800,3800 1845,3755 1910,3755 2545,3120 2545,2550 2545,1935 2510,1900 v1(2250,1900)
PC3: C6.2 R12.1 U1.18 | length 4571.2
  Top Layer w10: 1900,3800 1910,3790 2145,3790 2390,3545 2490,3545 2560,3615 2645.8,3615 U1.18 ; 2850,1824.05 v1(2850,1900) ; 2850,1824 2911,1885 3279.5,1885 R12.1 C6.2 3261.5,1824 3150,1824 2850,1824
  Bottom Layer w10: 1900,3800 1900,3795 2565,3130 2565,2540 2565,1935 2600,1900 v1(2850,1900)
PC4: U1.33 | length 1027.6
  Top Layer w10: 1800,3000 1850,3050 2510.8,3050 U1.33
PC5: U1.34 | length 935.8
  Top Layer w10: 1900,3000 2488.6,3000 U1.34
PC6: U1.63 | length 1192.7
  Top Layer w10: U1.63 3650,2750 4150,2750 4200,2800
PC7: U1.64 | length 1043.1
  Top Layer w10: U1.64 3627.8,2800 4100,2800
PC8: U1.65 | length 1135
  Top Layer w10: U1.65 3605.7,2850 4150,2850 4200,2900
PC9: U1.66 | length 985.5
  Top Layer w10: U1.66 3583.5,2900 4100,2900
PC10: U1.78 | length 775
  Top Layer w10: U1.78 3393.4,3515 4080,3515 4095,3500 4100,3500
PC11: U1.79 | length 912.2
  Top Layer w10: U1.79 3400.6,3550 4150,3550 4200,3600
PC12: U1.80 | length 820.4
  Top Layer w10: U1.80 3422.7,3600 4100,3600
PC13: U1.7 | length 1563.1
  Top Layer w10: 1800,4300 1850,4350 2490,4350 2820,4020 2820,3945 2775,3900 2775,3792 U1.7
PC14: C10.2 JT1.2 U1.8 | length 1399.8
  Top Layer w10: 1900,4300 2409.6,4300 JT1.2 ; C10.2 2785,3940 2785,3935 2755,3905 2755,3784.2 U1.8
  Top Layer w15: JT1.2 2720.2,4089.8 2763.3,4046.7 C10.2
PC15: C11.2 JT1.1 U1.9 | length 1406.8
  Top Layer w10: 1800,4200 1850,4250 2320.4,4250 JT1.1 ; C11.2 2673.3,3838.1 U1.9
  Top Layer w15: JT1.1 2614.8,4020.2 2705,3930 2705,3903.4 C11.2
PD0: U1.81 | length 970
  Top Layer w10: U1.81 3444.9,3650 4150,3650 4200,3700
PD1: U1.82 | length 878.1
  Top Layer w10: U1.82 3467,3700 4100,3700
PD2: U1.83 | length 1027.6
  Top Layer w10: U1.83 3489.2,3750 4150,3750 4200,3800
PD3: U1.84 | length 935.8
  Top Layer w10: U1.84 3511.4,3800 4100,3800
PD4: U1.85 | length 1085.5
  Top Layer w10: U1.85 3533.5,3850 4150,3850 4200,3900
PD5: U1.86 | length 993.6
  Top Layer w10: U1.86 3555.7,3900 4100,3900
PD6: U1.87 | length 1143.1
  Top Layer w10: U1.87 3577.8,3950 4150,3950 4200,4000
PD7: U1.88 | length 1051.3
  Top Layer w10: U1.88 3600,4000 4100,4000
PD8: U1.55 | length 1423.7
  Top Layer w10: U1.55 3827.3,2350 4150,2350 4200,2400
PD9: U1.56 | length 1274.1
  Top Layer w10: U1.56 3805.1,2400 4100,2400
PD10: U1.57 | length 1365.9
  Top Layer w10: U1.57 3783,2450 4150,2450 4200,2500
PD11: U1.58 | length 1216.3
  Top Layer w10: U1.58 3760.8,2500 4100,2500
PD12: U1.59 | length 1308.2
  Top Layer w10: U1.59 3738.6,2550 4150,2550 4200,2600
PD13: U1.60 | length 1158.6
  Top Layer w10: U1.60 3716.5,2600 4100,2600
PD14: U1.61 | length 1250.5
  Top Layer w10: U1.61 3694.3,2650 4150,2650 4200,2700
PD15: U1.62 | length 1100.8
  Top Layer w10: U1.62 3672.2,2700 4100,2700
PE0: U1.97 | length 1424.8
  Top Layer w10: U1.97@3090,3740 3805,4455 4155,4455 4200,4500
PE1: U1.98 | length 1339.9
  Top Layer w10: U1.98 3821.6,4500 4100,4500
PE2: U1.1 | length 1738.7
  Top Layer w10: 1800,4600 1865,4665 2325,4665 2940,4050 2940,3915 2895,3870 2895,3839.1 U1.1
PE3: U1.2 | length 1578.4
  Top Layer w10: 1900,4600 2365,4600 2920,4045 2920,3920 2875,3875 2875,3831.2 U1.2
PE4: U1.3 | length 1671.9
  Top Layer w10: 1800,4500 1850,4550 2390,4550 2900,4040 2900,3925 2855,3880 2855,3825 2929,3751 U1.3
PE5: U1.4 | length 1523.9
  Top Layer w10: 1900,4500 2415,4500 2880,4035 2880,3930 2835,3885 2835,3815.6 U1.4
PE6: U1.5 | length 1617.5
  Top Layer w10: 1800,4400 1850,4450 2440,4450 2860,4030 2860,3935 2815,3890 2815,3807.7 U1.5
PE7: U1.38 | length 1051.3
  Top Layer w10: 1900,2800 2400,2800 U1.38
PE8: U1.39 | length 1200.8
  Top Layer w10: 1800,2700 1850,2750 2377.8,2750 U1.39
PE9: U1.40 | length 1109.1
  Top Layer w10: 1900,2700 2355.7,2700 U1.40
PE10: U1.41 | length 1258.6
  Top Layer w10: 1800,2600 1850,2650 2333.5,2650 U1.41
PE11: U1.42 | length 1166.7
  Top Layer w10: 1900,2600 2311.4,2600 U1.42
PE12: U1.43 | length 1319.2
  Top Layer w10: 1800,2500 1800,2505 1845,2550 2289.2,2550 U1.43
PE13: U1.44 | length 1224.4
  Top Layer w10: 1900,2500 2267,2500 U1.44
PE14: U1.45 | length 1380
  Top Layer w10: 1800,2400 1800,2410 1845,2455 2249.9,2455 U1.45
PE15: U1.46 | length 1282.2
  Top Layer w10: 1900,2400 2222.7,2400 U1.46
Q1_1: Q1.1 R19.2 | length 1310.1
  Top Layer w10: Q1.1 2322.6,5642.6 v1(2325,5645) ; R19.2 2845,5160 v1(2845,5235)
  Bottom Layer w10: v1(2325,5645) 2255,5645 2195,5585 2195,5480 2235,5440 2415,5440 2470,5385 2470,5250 2510,5210 2820,5210 v1(2845,5235)
Q1_3: D2.2 Q1.3 R24.1 | length 1558.1
  Top Layer w10: D2.2 2360,5727.01 Q1.3 ; Q1.3 2447.2,5687.2 2485,5725 2485,5815 2535,5865 3005,5865 3255,5615 3255,5445 R24.1
Q2_3: Q2.3 R23.1 | length 694.4
  Top Layer w10: R23.1 2200,5695 2235,5660 2235,5350 2307.2,5277.8 Q2.3
R1_2: LED1.2 R1.2 | length 106.7
  Top Layer w10: LED1.2 R1.2
R2_2: LED2.2 R2.2 | length 112.2
  Top Layer w10: LED2.2 3056.78,2158.83 R2.2
R3_2: LED3.1 R3.2 | length 114.3
  Top Layer w10: LED3.1 R3.2
R14_2: PWR.1 R14.2 | length 103.6
  Top Layer w20: R14.2 PWR.1
R22_2: Q2.1 R22.2 | length 144.9
  Top Layer w10: R22.2 2320,5449.6 Q2.1
RESET: C12.1 D2.1 R4.1 R10.1 U1.14 | length 8400.1
  Top Layer w10: 1900,4000 2035,4000 2410,3625 2470,3625 2540,3695 2677.2,3695 U1.14 2837.2,3535 v1(2855,3515) ; D2.1 2420,5795 v1(2420,5865) ; v1(3270,4745) 3440,4915 3600,4915 3655,4970 3655,5075 3825,5245 R4.1 C12.1 ; 3660,6020 3820,5860 3965,5860 R10.1 4100,5865 4230,5865 4265,5830 4265,5250 4231.9,5216.9 4195,5216.9
  Top Layer w20: C12.1 4068.11,5216.89 4195,5216.89
  Bottom Layer w10: v1(2420,5865) 2280,5865 1825,5410 1825,4750 1890,4685 2500,4685 2560,4745 v1(3270,4745) 3225,4745 3200,4720 3200,4105 2910,3815 2910,3570 v1(2855,3515)
S$18: 
S$20: 
S$56: 
S$71: 
S$17927: 
S$20899: 
S$29951: 
S$29954: 
S$30659: 
S$39742: 
S$39751: 
S$39754: 
S$39756: 
S$39792: 
S$39800: 
S$39802: 
S$44758: 
TP1_1: TP1.1
TP2_1: TP2.1
TP3_1: TP3.1
TP4_1: TP4.1
U2_2: C2.1 C3.1 L1.1 U2.2 U2.4 | length 849.8
  Top Layer w15: 3203,4574.1 3225.9,4574.1 3265,4535 3415,4535 L1.1
  Top Layer w30: U2.4@2653,4609.6 2897,4609.6 2932.5,4574.1 3055,4574.1 3203.33,4574.12
U2_3: C1.1 D1.2 U2.3 | length 265.5
  Top Layer w30: C1.1 2815,4781.6 2897,4699.6 D1.2
U3_6: R18.1 U3.6 | length 634.9
  Top Layer w10: U3.6 2345,5180 R18.1
  Top Layer w20: 1905,4970 1905,4980 2295,4980 2345,5030 U3.6
U3_7: R18.2 U3.7 | length 605.1
  Top Layer w10: R18.2 2295,5170 U3.7
  Top Layer w20: 1905,5120 1925,5120 2030,5015 2275,5015 2295,5035 U3.7
U5_4: C24.1 U5.4 | length 341
  Top Layer w10: C24.1 2675,5115 2675,5315 2740,5380 U5.4
U5_5: R15.1 U5.5 | length 1613
  Top Layer w10: v1(2615,5555) 2615,5530 2715,5430 U5.5 2860,5430 2975,5315 R15.1
  Top Layer w15: 1879,5820 1980,5820 2030,5870 v1(2030,5905)
  Bottom Layer w10: v1(2030,5905) 2525,5905 2570,5860 2570,5600 v1(2615,5555)
U5_6: U5.6 | length 1327.7
  Top Layer w10: v1(2650,5555) 2650,5540 2710,5480 U5.6
  Top Layer w15: 1879,5845.6 1965.6,5845.6 2000,5880 v1(2000,5935)
  Bottom Layer w10: v1(2000,5935) 2540,5935 2595,5880 2595,5610 v1(2650,5555)
U5_7: C21.2 U5.7 X1.1 | length 594.3
  Top Layer w10: v1(2710,5535) 2710,5530 U5.7 2895,5530 2960,5595 C21.2
  Bottom Layer w15: X1.1 2644,5601 v1(2710,5535)
U5_8: C22.2 U5.8 X1.2 | length 731
  Top Layer w10: v1(2715,5580) U5.8
  Top Layer w12: U5.8 2885,5580 2960,5655 3115,5655 C22.2
  Bottom Layer w15: v1(2715,5580) 2836,5701 X1.2
U5_13: R19.1 U5.13 | length 593.8
  Top Layer w10: U5.13 2620,5380 2655,5345 2655,5205 2620,5170 2620,5085 2635,5070 2755,5070 R19.1
U5_14: Q1.2 R22.1 U5.14 | length 347.4
  Top Layer w10: Q1.2 2400,5590.2 R22.1 2400,5440 2510,5330 U5.14
VBAT: C4.1 C13.2 C14.2 C15.2 C16.2 C17.2 L1.2 L2.2 Q2.2 R4.2 R5.2 R6.2 R7.2 R9.2 R10.2 R11.2 R12.2 R13.2 R15.2 R24.2 U1.6 U1.11 U1.28 U1.50 U1.75 U1.100 | length 21418.4
  Top Layer w10: 1800,4100 1850,4150 2305.7,4150 U1.11 3000,3455 ; 1900,2200 2134.1,2200 U1.50 2985,3050.9 2985,3130 2870,3245 2870,3305 2955,3390 3000,3390 ; 1900,3300 1915,3285 2606.6,3285 U1.28 2741.6,3420 2970,3420 3000,3390 ; 1900,4400 2465,4400 2840,4025 2840,3940 2795,3895 2795,3799.9 U1.6 2930,3664.9 ; 2900,2850 2900,2880 ; C15.2 3032.7,3777.2 U1.100 3010.9,3745 3000,3745 2930,3675 2930,3664.1 2930,3575 3000,3505 3000,3455 ; U1.75 3344.1,3390 3000,3390 ; 3000,3390 3000,3455
  Top Layer w15: C17.2 2905,2553.75 2905,2710 2900,2715 2900,2750 ; U1.75 3377.2,3382.2 3395,3400 C16.2 3489.7,3445 v1(3985,3445)
  Top Layer w20: 1800,4000 1800,4100 ; 1965,6075 2065.01,6075 ; 2265.01,6075 2165.01,6075 2065.01,6075 ; Q2.2 2307.8,5372.2 v1(2265,5415) 2265,5705 2065,5905 2065,6075 ; C14.2@2726.3,2510 C17.2@2861.3,2510 ; 2900,2750 2900,2850 ; v1(2900,5215) 2945,5215 R15.2 3075,5185 R24.2 3220,5275 3318,5373 R5.2 ; C15.2 2970,3850 2970,3999.1 3027.9,4057.1 ; 2960,6120 2960,6020 3265,5715 R5.2 ; 3027.9,4057 3075.9,4105 v1(3235,4105) ; L2.2 C13.2 C17.2@2861.3,2510 ; v1(3305,4275) 3305,4305 3340,4340 3505,4340 3545,4380 3545,4610 3510,4645 3335,4645 3310,4620 ; L1.2 C4.1 ; v1(3710,4725) 3415,4725 3310,4620 ; v1(3710,4925) 3735,4950 3735,5080 v1(3820,5165) R4.2 ; R13.2 R12.2 R11.2 2299.5,1985.5 2220,2065 2220,2250 2545,2575 2835,2575 2861.3,2548.7 C17.2@2861.3,2510 ; v1(3925,4600) 4100,4600 ; v1(3925,5610) 3848.02,5686.98 R9.2 ; R10.2 R9.2 ; 4200,3300 4200,3400 ; C4.1 3310,4620 ; C4.1 3310,4620 ; R5.2 R6.2 R7.2 R9.2
  Bottom Layer w10: v1(3985,3445) 4160,3445 4200,3405 4200,3400
  Bottom Layer w15: 2900,2850 2970,2920 3335,2920 3455,3040 3455,3360 v1(3415,3400)
  Bottom Layer w20: 1905,5270 2120,5270 v1(2265,5415) 2390,5415 2445,5360 2445,5235 2495,5185 2870,5185 v1(2900,5215) ; v1(3235,4105) 3235,4240 3270,4275 v1(3305,4275) ; v1(3710,4725) v1(3710,4925) ; v1(3820,5165) 3925,5165 3925,5164.95 ; v1(3925,4600) v1(3925,5610)
VDDA: C18.2 C19.2 L2.1 U1.21 U1.22 | length 3905.3
  Top Layer w10: 1800,3600 1850,3650 2210,3650 2375,3485 2505,3485 2575,3555 2622.3,3555 U1.21 U1.22 ; 1900,3600 2235,3600 2370,3465 2510,3465 2580,3535 2614.4,3535 U1.22 ; C18.2 2445,3390 v1(2480,3355) ; v1(2715,3430) 2715,3434.4 U1.22
  Top Layer w20: L2.1 3175,2470 3231.3,2470 3271.3,2510 3315,2553.7 v1(3315,2635)
  Bottom Layer w10: v1(2480,3355) 2485,3350 2645,3350 ; v1(2715,3430) 2715,3420 2645,3350 ; v1(3315,2635) 2830,2635 2645,2820 2645,3350
pads on no net: U1.73 U3.5 U5.9 U5.10 U5.11 U5.12 U5.15 U7.1 U7.2 U8.1 U8.2 U9.1 U9.2 U10.1 U10.2 U11.1 U11.2 U11.3 U11.4 U11.5 U11.6 U11.7 U11.8 U11.9 U11.10 U11.11 U11.12 U11.13 U11.14 U11.15 U11.16 U11.17 U11.18 U11.19 U11.20 U12.1 U12.2 U12.3 U12.4 U12.5 U12.6 U13.7 U13.8 U13.9 U13.10 U13.A5 U13.A9 U13.A12 U13.B5 U13.B9 U13.B12 U14.1 U14.2 U14.3 U14.4 U15.1 U15.2 U15.3 U15.4 U15.5 U15.6 U15.7 U15.8 U16.1 U16.2 U16.3 U16.4 U16.5 U16.6 U16.7 U16.8 U17.1 U17.2 U17.3 U17.4 U17.5 U17.6 U17.7 U17.8 U17.9 U17.10 U17.11 U17.12 U17.13 U17.14 U17.15 U17.16 U17.17 U17.18 U17.19 U17.20 U17.21 U17.22 U17.23 U17.24 U17.25 U17.26 U17.27 U17.28 U17.29 U17.30 U17.31 U17.32 U17.33 U17.34 U17.35 U17.36 U17.37 U17.38 U17.39 U17.40 U17.41 U17.42 U17.43 U17.44 U17.45 U17.46 U17.47 U17.48 U17.49 U17.50 U18.1 U18.2 U18.3 U18.4 U18.5 U18.6 U18.7 U18.8 U18.9 U18.10 U18.11 U18.12 U18.13 U18.14 U18.15 U18.16 U18.17 U18.18 U18.19 U18.20 U18.21 U18.22 U18.23 U18.24 U18.25 U18.26 U18.27 U18.28 U18.29 U18.30 U18.31 U18.32 U18.33 U18.34 U18.35 U18.36 U18.37 U18.38 U18.39 U18.40 U18.41 U18.42 U18.43 U18.44 U18.45 U18.46 U18.47 U18.48 U18.49 U18.50 USB3.1 USB3.2 USB3.3 USB3.4 USB3.5 USB3.6 USB3.7 USB3.8 USB3.9

## Polygon pours and split planes (outlines as drawn)
GND on Bottom Layer (solid): 1500,6400 4500,6400 4500,1500 1500,1500
GND on Top Layer (solid): 1500,6400 4500,6400 4500,1500 1500,1500 1500,1505

## Keep-outs
Keep-Out Layer:
  lines w10: 1660,1590 ccw(c1675,1590) 1675,1575 ; 4325,1575 ccw(c4325,1590) 4340,1590 ; 4325,6275 cw(c4325,6260) 4340,6260
  lines w10 net S$30659: 1660,6260 cw(c1675,6260) 1675,6275

## Other copper
Top Layer:
  drawing of 340 lines, arcs and shapes, not listed
Bottom Layer:
  region net U5_7: 2662.75,5715.47 2625.25,5715.47 2636.5,5692.97 2651.5,5692.97
  region net PA0: 2192.94,2086 2192.94,2104 2201.34,2100 2201.34,2090
  region net PC2: 2257.94,1891 2257.94,1909 2266.34,1905 2266.34,1895
  region net PC3: 2842.06,1891 2842.06,1909 2833.66,1905 2833.66,1895
  region net PB13: 3147.94,2191 3147.94,2209 3156.34,2205 3156.34,2195
  region net VBAT: 3827.94,5156 3827.94,5174 3836.34,5175 3836.34,5155
  region net PB9: 2151,4882.06 2169,4882.06 2167.5,4873.66 2152.5,4873.66
  region net PA9: 2736.98,4889.25 2724.25,4901.98 2731.46,4903.54 2738.54,4896.46
  region net PA9: 2726,5147.06 2744,5147.06 2740,5138.66 2730,5138.66
  region net PA13: 3595.75,5783.02 3583.02,5795.75 3579.91,5786.98 3586.98,5779.91
  region net PA15: 3401,5787.06 3419,5787.06 3415,5778.66 3405,5778.66
  region net Q1_1: 2317.06,5636 2317.06,5654 2308.66,5650 2308.66,5640
  region net Q1_1: 2845.75,5223.02 2833.02,5235.75 2829.91,5226.98 2836.98,5219.91
  region net VBAT: 2900.75,5203.02 2888.02,5215.75 2881.38,5210.52 2895.52,5196.38
  region net PA9: 3155.75,3283.02 3143.02,3295.75 3139.91,3286.98 3146.98,3279.91
  region net PA10: 3126.98,3455.75 3114.25,3443.02 3123.02,3439.91 3130.09,3446.98
  region net PA10: 3245.75,3336.98 3233.02,3324.25 3229.91,3333.02 3236.98,3340.09
  region net PA13: 3296.98,3364.25 3284.25,3376.98 3293.02,3380.09 3300.09,3373.02
  region net PA1: 2587.06,3481 2587.06,3499 2578.66,3495 2578.66,3485
  region net PA2: 2570.75,3453.02 2558.02,3465.75 2554.91,3456.98 2561.98,3449.91
  region net VDDA: 2720.86,3419.53 2703.88,3425.49 2704.35,3416.42 2714.82,3412.75
  region net PB2: 2856.98,3270.75 2844.25,3258.02 2853.02,3254.91 2860.09,3261.98
  region net PA9: 3100.75,3878.02 3088.02,3890.75 3084.91,3881.98 3091.98,3874.91
  region net RESET: 2866.98,3514.25 2854.25,3526.98 2863.02,3530.09 2870.09,3523.02
  region net VBAT: 3426.98,3400.75 3414.25,3388.02 3421.25,3383.14 3431.86,3393.75
  region net VDDA: 3307.06,2626 3307.06,2644 3298.66,2640 3298.66,2630
  region net PB2: 2996,3017.94 3014,3017.94 3010,3026.34 3000,3026.34
  region net BOOT0: 3296,4167.06 3314,4167.06 3310,4158.66 3300,4158.66
  region net VBAT: 3297.06,4266 3297.06,4284 3288.66,4285 3288.66,4265
  region net BOOT0: 3016.98,3209.25 3004.25,3221.98 3013.02,3225.09 3020.09,3218.02
  region net VBAT: 3226,4112.94 3244,4112.94 3245,4121.34 3225,4121.34
  region net VBAT: 3992.94,3436 3992.94,3454 4001.34,3450 4001.34,3440
  region net PB14: 3727.94,2241 3727.94,2259 3736.34,2255 3736.34,2245
  region net VDDA: 2490.31,3361.14 2484.8,3344 2493.95,3345 2497.16,3355
  region net PA2: 2366.98,3394.25 2354.25,3406.98 2363.02,3410.09 2370.09,3403.02
  region net PA1: 2346.98,3424.25 2334.25,3436.98 2343.02,3440.09 2350.09,3433.02
  region net BOOT0: 3071,3652.94 3089,3652.94 3085,3661.34 3075,3661.34
  region net BOOT0: 3071,3637.06 3089,3637.06 3085,3628.66 3075,3628.66
  region net VBAT: 3916,4607.94 3934,4607.94 3935,4616.34 3915,4616.34
  region net PB8: 2452.94,4816 2452.94,4834 2461.34,4832.5 2461.34,4817.5
  region net VBAT: 3701,4917.06 3719,4917.06 3720,4908.66 3700,4908.66
  region net VBAT: 3701,4732.94 3719,4732.94 3720,4741.34 3700,4741.34
  region net PA10: 3041,3532.94 3059,3532.94 3055,3541.34 3045,3541.34
  region net PA9: 2971,4052.06 2989,4052.06 2985,4043.66 2975,4043.66
  region net PA9: 3011,3967.94 3029,3967.94 3025,3976.34 3015,3976.34
  region net BOOT0: 3080.75,4401.98 3068.02,4389.25 3064.91,4398.02 3071.98,4405.09
  region net BOOT0: 2401.98,4645.75 2389.25,4633.02 2398.02,4629.91 2405.09,4636.98
  region net PA15: 2886,4892.94 2904,4892.94 2900,4901.34 2890,4901.34
  region net PA13: 3047.94,4876 3047.94,4894 3056.34,4890 3056.34,4880
  region net PA15: 2902.94,4761 2902.94,4779 2911.34,4775 2911.34,4765
  region net PA15: 3256.98,3499.25 3244.25,3511.98 3253.02,3515.09 3260.09,3508.02
  region net PA13: 3047.94,4786 3047.94,4804 3056.34,4800 3056.34,4790
  region net PA14: 3606,4847.94 3624,4847.94 3620,4856.34 3610,4856.34
  region net PA14: 3346.98,4065.75 3334.25,4053.02 3343.02,4049.91 3350.09,4056.98
  region net PA14: 3176.98,3484.25 3164.25,3496.98 3173.02,3500.09 3180.09,3493.02
  region net RESET: 3262.06,4736 3262.06,4754 3253.66,4750 3253.66,4740
  region net RESET: 3262.06,4736 3262.06,4754 3253.66,4750 3253.66,4740
  region net PB3: 3967.94,4926 3967.94,4944 3976.34,4940 3976.34,4930
  region net PB3: 3771,5017.94 3789,5017.94 3785,5026.34 3775,5026.34
  region net U5_7: 2710.75,5546.98 2698.02,5534.25 2693.14,5541.25 2703.75,5551.86
  region net U5_8: 2726.98,5579.25 2714.25,5591.98 2721.25,5596.86 2731.86,5586.25
  region net +5V: 2842.06,5481 2842.06,5499 2833.66,5500 2833.66,5480
  region net +5V: 2861.98,5489.25 2849.25,5501.98 2854.48,5508.62 2868.62,5494.48
  region net +5V: 2601,5252.94 2619,5252.94 2620,5261.34 2600,5261.34
  region net PA14: 3606,5557.06 3624,5557.06 3620,5548.66 3610,5548.66
  region net PB3: 3925.75,5783.02 3913.02,5795.75 3909.91,5786.98 3916.98,5779.91
  region net VBAT: 3916,5602.06 3934,5602.06 3935,5593.66 3915,5593.66
  region net PA10: 3251.98,4720.75 3239.25,4708.02 3248.02,4704.91 3255.09,4711.98
  region net RESET: 2412.06,5856 2412.06,5874 2403.66,5870 2403.66,5860
  region net +5V: 1842.94,5571 1842.94,5589 1851.34,5590 1851.34,5570
  region net +5V: 1970.75,5953.02 1958.02,5965.75 1951.38,5960.52 1965.52,5946.38
  region net VBAT: 2265.75,5403.02 2253.02,5415.75 2246.38,5410.52 2260.52,5396.38
  region net VBAT: 2272.94,5406 2272.94,5424 2281.34,5425 2281.34,5405
  region net U5_6: 2650.75,5566.98 2638.02,5554.25 2634.91,5563.02 2641.98,5570.09
  region net U5_5: 2615.75,5566.98 2603.02,5554.25 2599.91,5563.02 2606.98,5570.09
  region net U5_6: 2007.94,5926 2007.94,5944 2016.34,5940 2016.34,5930
  region net U5_5: 2037.94,5896 2037.94,5914 2046.34,5910 2046.34,5900
  region net U5_8: 2858.15,5725.47 2813.86,5725.47 2828.5,5704.8 2843.5,5704.8

## Silkscreen, mask and mechanical layers (free items; w line width, h text height)
Top Overlay:
  lines w10 net S$17927: 1980,4649.8 1965,4649.8 1965,2150 2200,2150 2200,4650 1980,4650 ; 3810,4649.8 3795,4649.8 3795,2150 4030,2150 4030,4650 3810,4650
  lines w10 net S$20899: 2960,2912.5 3040,3007.5
  text "GND" at 1930,6222.5 h25
  text "GND" at 2345,6222.5 h25
  text "JLCJLCJLCJLC" at 3125,6140.47 h59.05
  text "3.3V" at 2017.5,5390 h45 r270
  text "CANH" at 2017.5,5225 h45 r270
  text "Github@Fir-Geek" at 3250,5160 h75
  text "CANL" at 2017.5,5030 h45 r270
  text "Geeky" at 2885,4890 h300 r354
  text "V3.5" at 3715,4885 h150
  text "GND" at 2017.5,4840 h45 r270
  text "PE2" at 1985,4570 h30
  text "PE3" at 2100,4570 h30
  text "3V3" at 3815,4570 h30
  text "GND" at 3925,4570 h30
  text "PE4" at 1985,4470 h30
  text "PE5" at 2100,4470 h30
  text "PE1" at 3815,4470 h30
  text "PE0" at 3930,4470 h30
  text "PE6" at 1985,4370 h30
  text "VBT" at 2095,4370 h30
  text "PB9" at 3815,4370 h30
  text "PB8" at 3930,4370 h30
  text "PC13" at 1985,4270 h30
  text "PC14" at 2095,4270 h30
  text "BOT0" at 3810,4270 h30
  text "PB7" at 3930,4270 h30
  text "PC15" at 1985,4170 h30
  text "GND" at 2100,4170 h30
  text "PB6" at 3815,4170 h30
  text "PB5" at 3930,4170 h30
  text "VBT" at 1985,4070 h30
  text "GND" at 2100,4070 h30
  text "PB4" at 3815,4070 h30
  text "PB3" at 3930,4070 h30
  text "3V3" at 1985,3970 h30
  text "RES" at 2100,3970 h30
  text "PD7" at 3815,3970 h30
  text "PD6" at 3930,3970 h30
  text "PC0" at 1985,3870 h30
  text "PC1" at 2100,3870 h30
  text "PD5" at 3815,3870 h30
  text "PD4" at 3930,3870 h30
  text "PC2" at 1985,3770 h30
  text "PC3" at 2100,3770 h30
  text "PD3" at 3815,3770 h30
  text "PD2" at 3930,3770 h30
  text "GND" at 1980,3670 h30
  text "GND" at 2100,3670 h30
  text "PD1" at 3815,3670 h30
  text "PD0" at 3930,3670 h30
  text "VDA" at 1980,3570 h30
  text "VDA" at 2100,3570 h30
  text "PC12" at 3815,3570 h30
  text "PC11" at 3930,3570 h30
  text "PA0" at 1985,3470 h30
  text "PA1" at 2100,3470 h30
  text "PC10" at 3815,3470 h30
  text "PA15" at 3925,3470 h30
  text "PA2" at 1985,3370 h30
  text "PA3" at 2100,3370 h30
  text "PA14" at 3815,3370 h30
  text "3V3" at 3930,3370 h30
  text "GND" at 1985,3270 h30
  text "3V3" at 2100,3270 h30
  text "GND" at 3815,3270 h30
  text "3V3" at 3930,3270 h30
  text "PA4" at 1985,3170 h30
  text "PA5" at 2100,3170 h30
  text "PA13" at 3815,3170 h30
  text "PA12" at 3925,3170 h30
  text "PA6" at 1985,3070 h30
  text "PA7" at 2100,3070 h30
  text "PA11" at 3815,3070 h30
  text "PA10" at 3925,3070 h30
  text "1" at 2965,2987.5 h45 r180
  text "PC4" at 1985,2970 h30
  text "PC5" at 2100,2970 h30
  text "PA9" at 3815,2970 h30
  text "PA8" at 3930,2970 h30
  text "0" at 3015,2932.5 h45 r180
  text "PB0" at 1985,2870 h30
  text "PB1" at 2100,2870 h30
  text "PC9" at 3815,2870 h30
  text "PC8" at 3930,2870 h30
  text "1" at 2790,2802.5 h45 r180
  text "0" at 3185,2797.5 h45 r180
  text "PB2" at 1985,2770 h30
  text "PE7" at 2100,2770 h30
  text "PC7" at 3815,2770 h30
  text "PC6" at 3930,2770 h30
  text "PE8" at 1985,2670 h30
  text "PE9" at 2100,2670 h30
  text "PD15" at 3815,2670 h30
  text "PD14" at 3925,2670 h30
  text "PE10" at 1985,2570 h30
  text "PE11" at 2100,2570 h30
  text "PD13" at 3815,2570 h30
  text "PD12" at 3925,2570 h30
  text "PE12" at 1985,2470 h30
  text "PE13" at 2100,2470 h30
  text "PD11" at 3815,2470 h30
  text "PD10" at 3925,2470 h30
  text "PE14" at 1985,2370 h30
  text "PE15" at 2100,2370 h30
  text "PD9" at 3815,2370 h30
  text "PD8" at 3930,2370 h30
  text "PB10" at 1985,2270 h30
  text "PB11" at 2100,2270 h30
  text "PB15" at 3815,2270 h30
  text "PB14" at 3925,2270 h30
  text "GND" at 1985,2170 h30
  text "3V3" at 2100,2170 h30
  text "PB13" at 3815,2170 h30
  text "PB12" at 3925,2170 h30
  text "WK_UP" at 3485,1587.5 h45
Bottom Overlay:
  text "Github@Fir-Geek" at 3740,5085 h75
  text "Geeky" at 3890,4855 h300 r6
  text "V3.5" at 3850,4590 h100